# Allegro board P1_CONECTORI.brd
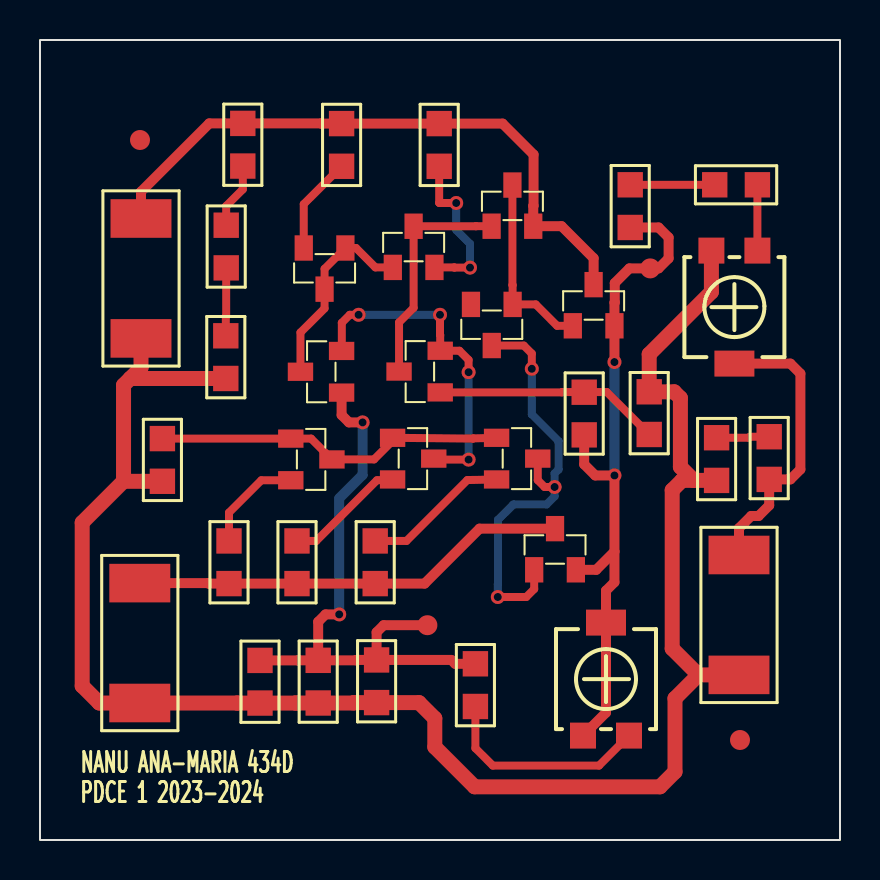
[diagram p0: board, top side]
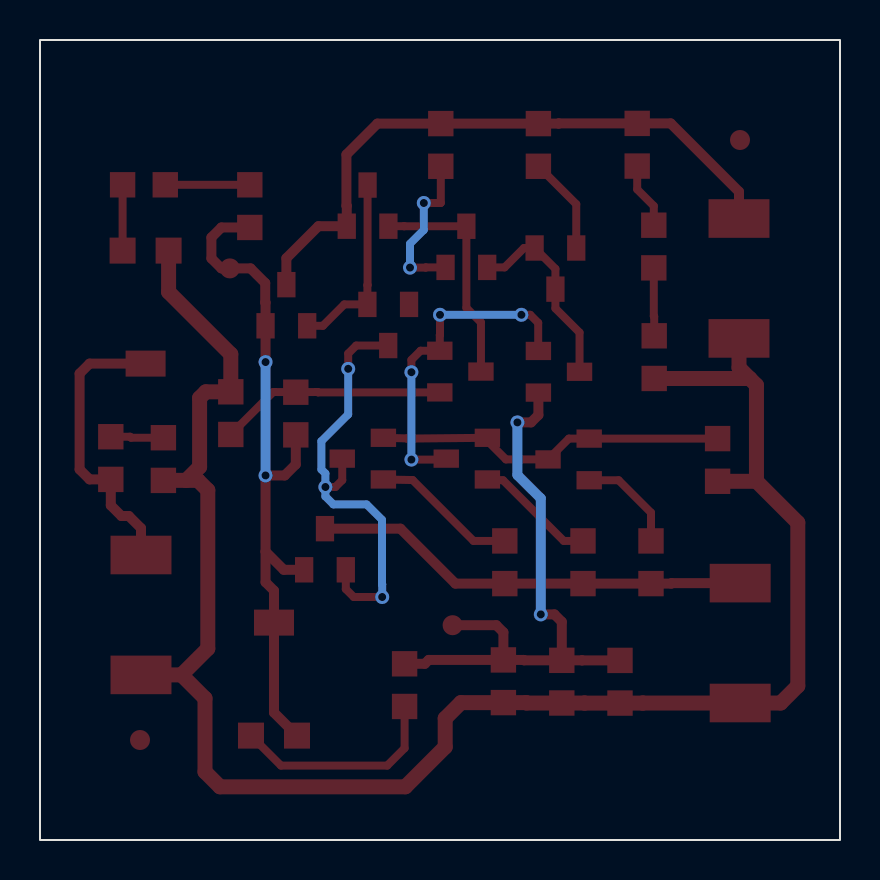
[diagram p1: board, bottom side, seen from below]

Outline 40 x 40 mm; copper layers: TOP, BOTTOM. Coordinates in mm from the lower left corner of the outline.
Outline path: rectangle 0,0 40,40

## Design rules (mm)
nets with their own width: min track width 0.4; nets N277240 N277246 N277332 N277344 N277350 N277444 N277526 N277708 N277740 N277746 N277758 N278084 N278094 N278106 N281268 N281272 N281276 N2772060
nets with their own width: min track width 0.5; nets +VCC -VCC COND OUT VOUT
nets with their own width: min track width 0.75; nets 0

## Placement (name value [footprint] x y rotation side)
C1  33n  [SMC0805]  11 8.98 270 top
C2  10n  [SMC0805]  13.91 6.85 90 top
C3  2.2n  [SMC0805]  16.83 6.87 90 top
D1  SMLS14BET  [SMR0805]  9.29 25.21 270 top
D2  BZX84C5V1/PLP  [TO236AA]  23.63 26.78 90 top
J1  CON2  [SMR2512]  5.05 25.08 90 top
J2  CON2  [SMR2512]  4.99 6.85 90 top
J3  CON2  [SMR2512]  34.95 14.25 270 top
J4  CON1  [TP100]  19.37 10.74 0 top
J5  CON1  [TP100]  30.51 28.58 0 top
NOREF  -  [unnamed]  5 35 0 top
NOREF#2  -  [#2]  40 0 90 top
NOREF#3  -  [#2]  0 40 0 top
NOREF#4  -  [unnamed]  35 5 0 top
P1  100  [TS53YL]  29.45 5.22 270 top
P2  10k  [TS53YL]  33.57 29.47 90 top
Q1  BC856B  [TO236AA]  17.64 28.63 270 top
Q2  BC856B  [TO236AA]  15.27 29.6 90 top
Q3  BC846B  [TO236AA]  20.01 22.38 0 top
Q4  BC846B  [TO236AA]  15.08 22.37 0 top
Q5  BC846B  [TO236AA]  17.63 20.11 180 top
Q6  BC846B  [TO236AA]  12.54 20.07 180 top
Q7  BC856B  [TO236AA]  22.58 30.69 270 top
Q8  BC846B  [TO236AA]  22.83 20.11 180 top
Q9  BC846B  [TO236AA]  26.64 25.71 270 top
Q10  BC856B  [TO236AA]  24.71 13.51 270 top
R1  150  [SMR0805]  10.14 35.83 270 top
R2  150  [SMR0805]  9.31 30.74 270 top
R3  10k  [SMR0805]  30.46 22.41 270 top
R4  10k  [SMR0805]  27.21 22.39 270 top
R5  2.2k  [SMR0805]  6.12 20.07 270 top
R6  100  [SMR0805]  21.77 8.81 270 top
R7  10k  [SMR0805]  29.51 32.76 270 top
R8  4.7k  [SMR0805]  35.87 32.76 180 top
R9  22k  [SMR0805]  36.46 18.03 90 top
R10  2k  [SMR0805]  33.83 17.98 90 top
R11  100  [SMR0805]  19.96 35.82 270 top
R12  100  [SMR0805]  15.08 35.82 270 top
R13  10  [SMR0805]  9.45 12.82 90 top
R14  10  [SMR0805]  12.85 12.82 90 top
R15  10  [SMR0805]  16.76 12.82 90 top

## Library data of the parts
C1 = C_0
C2 C3 = C
D1 = SMLS14BET_3
D2 = BZX84C5V1/PLP_3
J1-J3 = CON2
J4 J5 = CON1
P1 P2 = POT
Q1 Q2 Q7 Q10 = BC856B
Q3-Q6 Q8 Q9 = BC846B
R1-R15 = R

## Footprints (pads in the part's own frame, mm; a bottom-side part is the same pattern mirrored in y, then rotated)
SMC0805
  rect 1.27x1.27 smd: 1(0,0) 2(2.134,0)
SMR0805
  rect 1.27x1.27 smd: 1(0,0) 2(2.134,0)
SMR2512
  rect 1.93x3.048 smd: 1(0,0) 2(5.994,0)
TO236AA
  rect 1.27x0.914 smd: 1(0,0) 2(0,2.083) 3(-2.057,1.041)
TP100
  round 1 smd: 1(0,0)
TS53YL
  rect 1.3x1.3 smd: 1(0,0) 3(0,-2.3)
  rect 1.3x2 smd: 2(-5.65,-1.15)
unnamed
  round 1 smd: (0,0)

## Nets
+VCC: J1.2 Q7.2(E) Q9.3 R1.1 R11.1 R12.1
-VCC: J2.2 Q10.3 R13.1 R14.1 R15.1
0: C1.2 C2.1 C3.1 D1.2(C) J1.1 J2.1 J3.2 P2.1 R3.1 R5.2 R10.1
COND: C1.1 C2.2 C3.2 J4.1 Q4.1 R6.1
OUT: J5.1 P1.2(T) P1.3 Q9.2(E) Q10.2(E) R4.2 R7.2
VOUT: J3.1 P2.2(T) R9.1
N277240: Q1.2(E) R11.2
N277246: Q2.2(E) R12.2
N277332: Q1.1 Q2.1 Q2.3 Q4.3
N277344: D1.1 R2.2
N277350: Q1.3 Q3.3 Q7.1
N277444: D2.1 Q7.3 Q9.1
N277526: Q3.1 R3.2 R4.1
N277708: P1.1 R6.2
N277740: R7.1 R8.2
N277746: P2.3 R8.1
N277758: Q3.2(E) Q4.2(E) Q5.3
N278084: D2.3 Q8.3 Q10.1
N278094: R9.2 R10.2
N278106: Q5.1 Q6.1 Q6.3 Q8.1 R5.1
N281268: Q6.2(E) R13.2
N281272: Q5.2(E) R14.2
N281276: Q8.2(E) R15.2
N2772060: R1.2 R2.1

Pads without a net: D2 2

## Via types
v1: diameter 0.7, hole 0.4, TOP to BOTTOM, 13 vias

## Routing (per net, layer and track width the routed paths; a pad name or vN(x,y) marks a point on that pad's centre or on a via; arc(x,y) is an arc through that point)
+VCC: length 31.6
  TOP w0.5: J1.2 5.05,32.42 8.46,35.83 R1.1 14.06,35.83 14.07,35.82 R12.1 R11.1 23.13,35.82 24.68,34.27 24.68,31.72 24.66,31.7 Q7.2 26.08,30.69 27.68,29.09 Q9.3
-VCC: length 21.9
  TOP w0.5: Q10.3 21.98,15.57 19.23,12.82 R15.1 R14.1 R13.1 8.44,12.82 8.41,12.84 J2.2
0: length 92.2
  TOP w0.75: 4.51,23.08 5.05,23.61 J1.1 ; 4.51,23.08 4.18,22.74 4.18,17.94 ; 4.51,23.08 D1.2 ; R5.2 4.18,17.94 ; 4.18,17.94 2.11,15.87 2.11,7.7 2.96,6.85 J2.1 9.86,6.85 9.86,6.85 C1.2 12.77,6.85 12.77,6.85 C2.1 15.67,6.85 15.69,6.87 C3.1 18.95,6.87 19.74,6.08 19.74,4.65 21.73,2.66 31,2.66 31.75,3.41 31.75,7.08 32.92,8.26 ; 32.92,8.26 31.61,9.57 31.61,17.49 32.1,17.98 32.69,17.98 ; 32.92,8.26 J3.2 ; P2.1 33.57,27.4 30.46,24.29 R3.1 31.71,22.41 32.02,22.1 32.02,18.65 32.69,17.98 ; 32.69,17.98 R10.1
COND: length 30.5
  TOP w0.5: v1(16.13,20.88) 15.45,20.88 15.08,21.25 Q4.1 ; v1(14.96,11.28) 14.28,11.28 13.91,10.91 C2.2 ; J4.1 17.18,10.74 16.83,10.39 C3.2 ; C2.2 12.9,8.98 12.89,8.98 C1.1 ; C2.2 15.8,8.98 15.82,9 C3.2 ; C3.2 20.56,9 20.76,8.81 R6.1
  BOTTOM w0.5: v1(14.96,11.28) 14.96,17.08 16.13,18.25 v1(16.13,20.88)
OUT: length 35.2
  TOP w0.5: P1.3 28.3,6.37 P1.2 28.3,12.47 28.72,12.89 28.72,14.42 ; 28.72,14.42 v1(28.72,18.23) 27.76,18.23 27.21,18.78 R4.2 ; 28.72,14.42 27.81,13.51 Q10.2 ; R7.2 30.93,30.63 31.43,30.13 31.43,29.08 30.93,28.58 J5.1 29.47,28.58 28.74,27.85 28.74,26.88 28.72,26.87 Q9.2 v1(28.72,23.9)
  BOTTOM w0.5: v1(28.72,23.9) v1(28.72,18.23)
VOUT: length 14.7
  TOP w0.5: J3.1 34.95,15.59 35.56,16.2 35.93,16.2 36.46,16.73 R9.1 37.52,18.03 38.02,18.53 38.02,23.32 37.52,23.82 P2.2
N277240: length 8
  TOP w0.4: v1(20.81,31.85) 19.97,31.85 19.96,31.86 R11.2 ; v1(21.5,28.62) 20.72,28.62 20.71,28.63 Q1.2
  BOTTOM w0.4: v1(20.81,31.85) 20.81,30.5 21.5,29.81 v1(21.5,28.62)
N277246: length 4.9
  TOP w0.4: Q2.2 13.19,31.79 R12.2
N277332: length 10.1
  TOP w0.4: 17.64,28.81 Q1.1 16.77,28.63 15.8,29.6 Q2.1 14.23,28.56 Q2.3 14.23,26.58 13.02,25.37 Q4.3
N277344: length 3.4
  TOP w0.4: D1.1 9.29,26.17 9.31,26.19 R2.2
N277350: length 11.5
  TOP w0.4: Q7.1 21.8,30.69 21.79,30.69 Q1.3 18.68,26.61 17.95,25.88 Q3.3
N277444: length 9.4
  TOP w0.4: Q7.3 23.62,27.75 23.63,27.74 D2.1 24.79,26.78 25.86,25.71 Q9.1
N277526: length 11.3
  TOP w0.4: R3.2 28.34,22.4 R4.1 26.12,22.4 26.1,22.38 Q3.1
N277708: length 10.7
  TOP w0.4: P1.1 27.95,3.72 22.64,3.72 21.77,4.59 R6.2
N277740: length 4.2
  TOP w0.4: R7.1 R8.2
N277746: length 3.3
  TOP w0.4: P2.3 R8.1
N277758: length 16.6
  TOP w0.4: v1(20,26.26) 20,25.26 20.01,25.25 Q3.2 20.97,24.46 21.43,24 v1(21.43,23.39) ; Q4.2 15.09,24.46 15.09,25.86 15.49,26.26 v1(15.93,26.26) ; Q5.3 19.99,19.02 v1(21.43,19.02)
  BOTTOM w0.4: v1(21.43,23.39) v1(21.43,19.02) ; v1(15.93,26.26) v1(20,26.26)
N278084: length 22.1
  TOP w0.4: v1(24.59,23.56) 24.59,24.32 24.19,24.72 D2.3 ; Q10.1 24.71,12.55 24.31,12.15 v1(22.89,12.15) ; v1(25.73,17.65) 25.23,17.65 24.89,17.99 Q8.3
  BOTTOM w0.4: v1(24.59,23.56) 24.59,21.28 25.93,19.94 25.93,18.53 25.73,18.33 v1(25.73,17.65) 25.73,17.18 25.33,16.78 23.67,16.78 22.9,16.01 22.9,12.79 22.89,12.78 v1(22.89,12.15)
N278094: length 2.7
  TOP w0.4: R10.2 35.45,20.11 35.5,20.16 R9.2
N278106: length 17.8
  TOP w0.4: R5.1 Q6.1 13.56,20.07 Q6.3 16.7,19.03 17.74,20.07 Q5.1 21.65,20.07 21.66,20.08 Q8.1
N281268: length 5.2
  TOP w0.4: Q6.2 11.07,17.99 9.45,16.37 R13.2
N281272: length 6
  TOP w0.4: R14.2 13.81,14.95 16.85,17.99 Q5.2
N281276: length 7.3
  TOP w0.4: Q8.2 21.37,18 18.32,14.95 R15.2
N2772060: length 3.3
  TOP w0.4: R2.1 9.31,31.7 10.14,32.53 R1.2

## Text on the board
Ref Des/Silkscreen Top: PDCE 1 2023-2024 | NANU ANA-MARIA 434D
XSECTION_CHART: *  SURFACE | L1 TOP CONDUCTOR | *  DIELECTRIC | L2 BOTTOM CONDUCTOR | DESIGN CROSS SECTION CHART | ___________________________ | TOTAL THICKNESS 1.67 MM | 1-2
DIMENSION: FIGURE | FINISHED_SIZE | 0.4 | DRILL CHART: TOP to BOTTOM | ALL UNITS ARE IN MILLIMETERS | PLATED | QTY | 13
